# Altium PCB rpi_board.PcbDoc (part 2 of 2)
Units mm, origin at the board's own origin, x right, y up, seen from the top; angles counter-clockwise.
Board outline 68.45 x 53.59 mm, 2 copper layers (Top Layer, Bottom Layer), stack 1.569 mm thick; 73 components, 83 nets, 335 pads, 96 vias.
Unrouted connection lines stored in the file: 3.
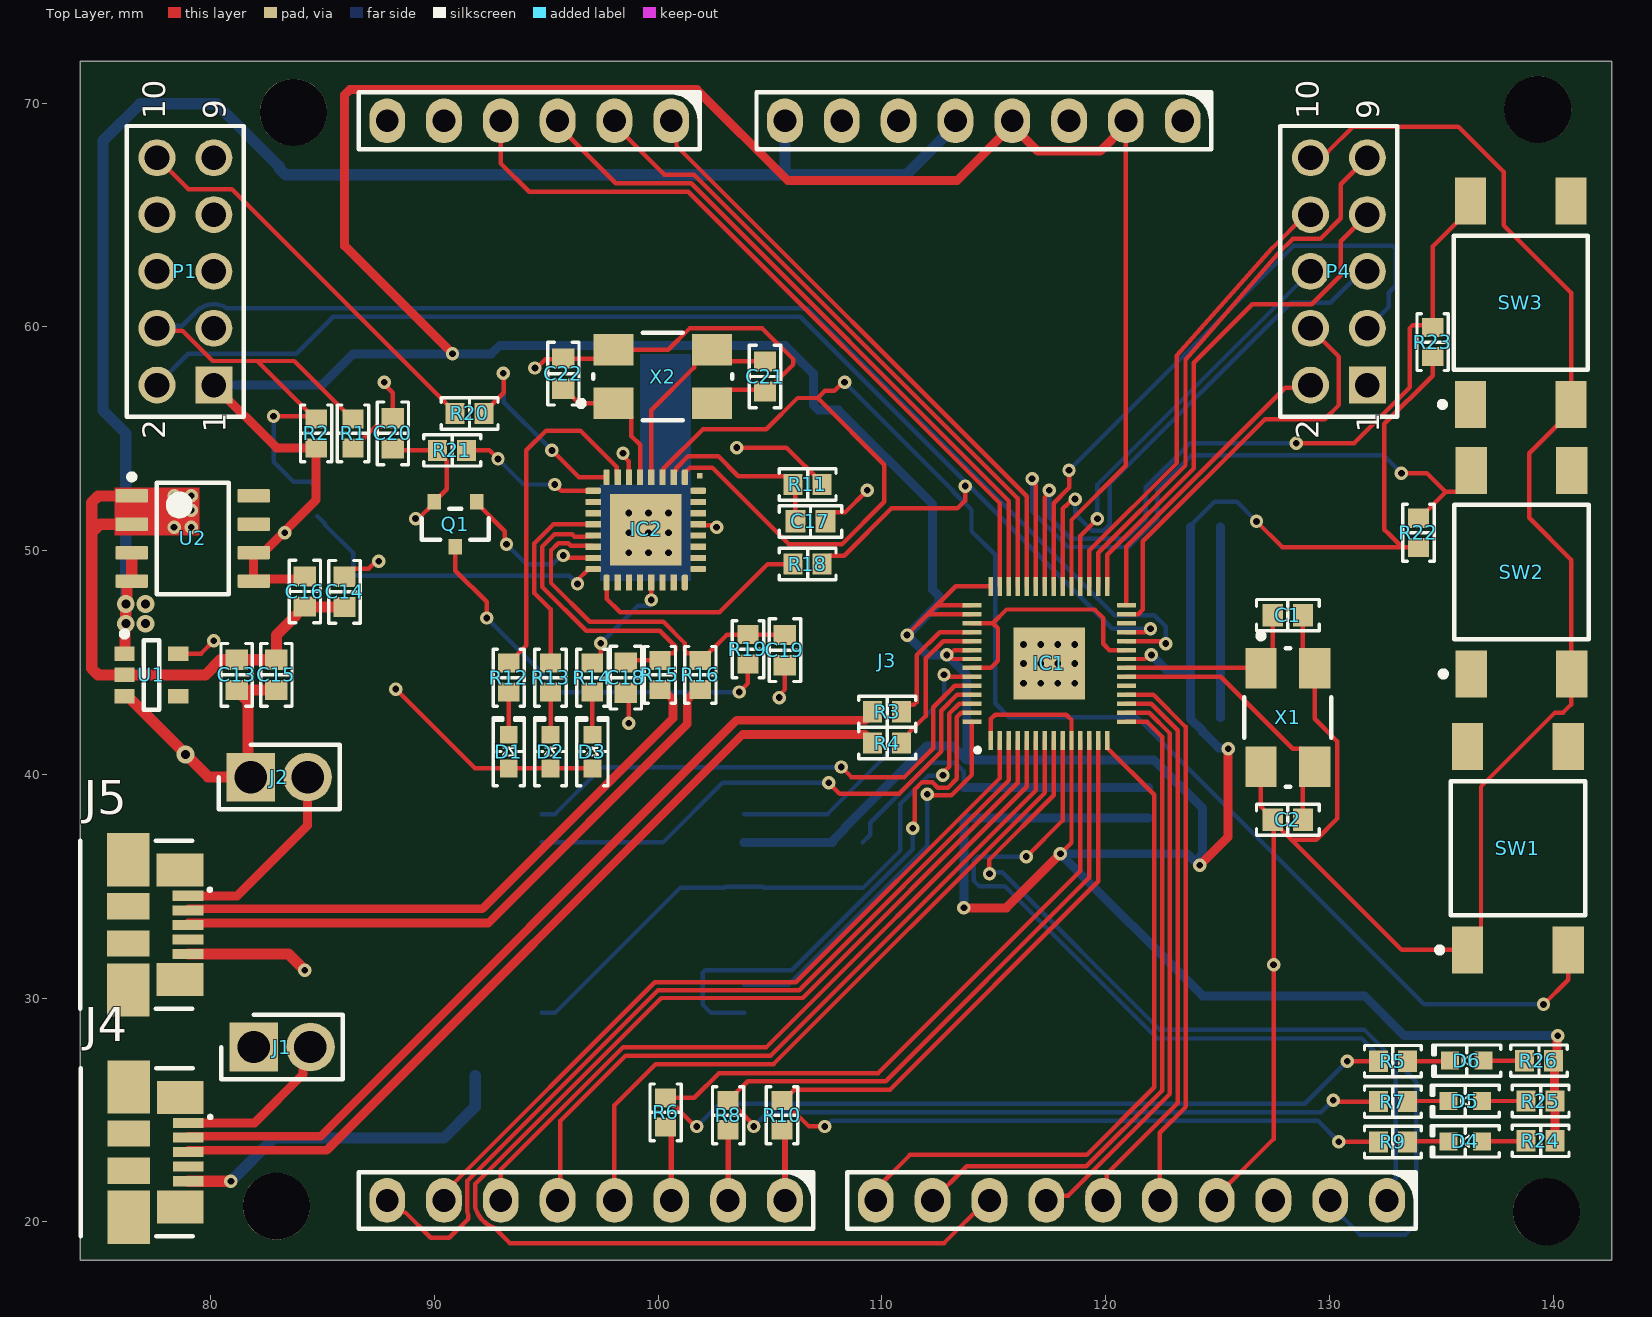
[diagram p0: Top Layer view]

## Via types
v1: diameter 0.6, hole 0.3, Top Layer to Bottom Layer, 91 vias
v2: diameter 0.8, hole 0.4, Top Layer to Bottom Layer, 5 vias

## Nets (pads, with @x,y where several pads share a name; then routed paths per layer and width w, separated by ;. In a path a pad name is that pad's centre, name@x,y a point inside that pad or via, vN(x,y) a via of type N, cw(c..) or ccw(c..) an arc to the next point about the centre after c; other vN are vias at no path point) (continued)
NetIC1_39: (continued)
  Top Layer w0.2: J3.10 98.044,69.037 100.279,66.802 101.6,66.802 116.065,52.337 116.065,50.54 116.075,50.53 IC1.39
NetIC1_40: IC1.40 J3.11 | length 31.1
  Top Layer w0.2: J3.11 95.504,69.015 98.098,66.421 101.473,66.421 115.675,52.219 IC1.40
NetIC1_41: IC1.41 J3.12 | length 34.2
  Top Layer w0.2: J3.12 92.964,67.31 94.234,66.04 101.346,66.04 115.275,52.111 IC1.41
NetIC1_51: IC1.51 U3.1 | length 13.4
  Top Layer w0.2: v1(112.776,44.45) 112.884,44.45 112.976,44.358 IC1.51
  Bottom Layer w0.2: U3.1 107.569,38.227 112.776,43.434 v1(112.776,44.45)
NetIC1_52: IC1.52 U3.16 | length 23.1
  Top Layer w0.2: v1(108.188,40.33) 108.638,39.88 111.01,39.88 112.3,41.17 112.3,42.996 113.262,43.958 IC1.52
  Bottom Layer w0.2: U3.16 95.389,38.227 97.492,40.33 v1(108.188,40.33)
NetIC1_53: IC1.53 U3.15 | length 23.4
  Top Layer w0.2: v1(107.623,39.625) 108.107,39.14 110.766,39.14 112.65,41.025 112.65,42.851 113.357,43.558 IC1.53
  Bottom Layer w0.2: U3.15 100.21,36.957 102.878,39.625 v1(107.623,39.625)
NetIC1_54: IC1.54 U3.9 | length 27.7
  Top Layer w0.2: v1(112.726,39.959) 112.726,40.068 113,40.342 113,42.707 113.451,43.158 IC1.54
  Bottom Layer w0.2: U3.9 95.389,29.337 100.977,34.925 102.969,34.925 103.011,34.967 104.667,34.967 104.709,34.925 109.155,34.925 110.829,36.599 110.829,38.693 112.082,39.946 112.713,39.946 v1(112.726,39.959)
NetIC1_55: IC1.55 U3.8 | length 23.6
  Top Layer w0.2: v1(111.379,37.592) 111.456,37.669 111.456,37.901 111.464,37.909 111.464,39.328 111.794,39.658 112.25,39.658 112.498,39.409 112.954,39.409 113.35,39.806 113.35,42.562 113.546,42.758 IC1.55
  Bottom Layer w0.2: U3.8 102.362,29.337 101.981,29.718 101.981,31.125 102.098,31.242 105.967,31.242 111.379,36.654 v1(111.379,37.592)
NetIC1_56: IC1.56 U3.7 | length 17.8
  Top Layer w0.2: v1(112.022,39.108) 112.071,39.059 113.099,39.059 114.025,39.986 IC1.56
  Bottom Layer w0.2: U3.7 105.827,30.607 112.022,36.802 v1(112.022,39.108)
NetIC2_1: IC2.1 IC2.3 SW1.3 | length 77.5
  Top Layer w0.2: IC2.3 100.231,53.317 100.231,53.661 102.001,55.431 104.834,55.431 106.228,56.825 107.132,56.825 ; IC2.1 101.191,53.487 101.421,53.717 102.419,53.717 105.844,50.292 108.214,50.292 110.109,52.187 110.109,53.848 107.132,56.825 ; v1(108.331,57.531) 108.265,57.531 107.874,57.14 107.447,57.14 107.132,56.825 ; v1(139.573,29.718) 140.68,30.825 SW1.3
  Bottom Layer w0.2: v1(108.331,57.531) 113.171,52.691 113.171,52.66 114.005,51.825 114.005,50.871 115.062,49.814 115.062,43.18 115.697,42.545 121.412,42.545 134.239,29.718 v1(139.573,29.718)
NetIC2_7: IC2.7 R12.1 | length 15.4
  Top Layer w0.2: R12.1 94.107,45.761 94.107,54.483 94.996,55.372 96.52,55.372 98.151,53.741 98.151,53.317 IC2.7
NetIC2_8: IC2.8 R20.1 | length 9.5
  Top Layer w0.2: R20.1 92.217,56.184 93.091,57.058 93.091,57.912 v1(93.07,57.933) ; v1(95.25,54.483) 96.456,53.277 IC2.8
  Bottom Layer w0.2: v1(93.07,57.933) 93.091,57.912 93.091,56.642 v1(95.25,54.483)
NetIC2_9: IC2.9 R21.2 | length 6.4
  Top Layer w0.2: R21.2 92.456,54.483 v1(92.837,54.102) ; v1(95.377,52.959) 95.659,52.677 IC2.9
  Bottom Layer w0.2: v1(92.837,54.102) 93.98,52.959 v1(95.377,52.959)
NetIC2_12: IC2.12 R13.1 | length 8.6
  Top Layer w0.2: R13.1 95.186,47.378 94.457,48.107 94.457,50.323 95.315,51.181 97.087,51.181 IC2.12
NetIC2_15: IC2.15 Q1.1 | length 6.9
  Top Layer w0.2: Q1.1 91.882,52.131 93.141,50.872 93.141,50.369 v1(93.218,50.292) ; v1(95.757,49.784) 95.865,49.784 95.973,49.677 IC2.15
  Bottom Layer w0.2: v1(93.218,50.292) 94.107,49.403 95.29,49.403 95.672,49.784 v1(95.757,49.784)
NetIC2_16: IC2.16 R17.1 | length 14.5
  Top Layer w0.2: v1(96.393,48.514) 96.393,48.689 96.881,49.177 IC2.16
  Bottom Layer w0.2: R17.1@84.759,51.547 85.084,51.222 85.084,51.172 86.375,49.881 86.375,48.997 86.492,48.88 96.027,48.88 v1(96.393,48.514)
NetIC2_17: IC2.17 R18.1 | length 10.2
  Top Layer w0.2: IC2.17 97.691,47.851 98.298,47.244 102.743,47.244 104.902,49.403 R18.1
NetIC2_21: IC2.21 R14.1 | length 5
  Top Layer w0.2: R14.1 97.104,44.973 97.429,45.298 v1(97.429,45.867) ; IC2.21 99.692,48.576 99.692,47.797 v1(99.693,47.796)
  Bottom Layer w0.2: v1(97.429,45.867) 99.11,47.548 99.618,47.548 99.618,47.722 v1(99.693,47.796)
NetJ1_2: J1.2 J4.1 | length 7.4
  Top Layer w0.4: J4.1 81.945,24.414 84.115,26.584 84.115,27.473 J1.2
NetJ2_2: J2.2 J5.1 | length 8.8
  Top Layer w0.4: J5.1 81.181,34.574 84.328,37.721 J2.2
NetJ3_13: J3.13
NetJ3_14: J3.14
NetJ3_20: J3.20 R6.2 | length 3.4
  Top Layer w0.254: R6.2 100.584,23.988 J3.20
NetJ3_21: J3.21 R8.2 | length 3.2
  Top Layer w0.254: J3.21 R8.2
NetJ3_22: J3.22 R10.2 | length 3.2
  Top Layer w0.254: R10.2 105.664,23.988 J3.22
NetP1_10: P1.10 R20.2 | length 18.1
  Top Layer w0.2: P1.10 78.994,66.167 80.934,66.167 90.917,56.184 R20.2
NetQ1_3: Q1.3 R19.1 | length 17.8
  Top Layer w0.2: Q1.3 90.932,49.109 92.329,47.712 v1(92.329,46.99) ; v1@103.632,43.688 104.013,44.069 R19.1
  Bottom Layer w0.2: v1(92.329,46.99) 95.637,43.682 v1(103.621,43.682)
USB_D_N: C18.2 IC2.13 R15.2 | length 14.1
  Top Layer w0.2: IC2.13 97.051,50.637 96.761,50.637 96.751,50.627 96.258,50.627 96.151,50.734 95.364,50.734 94.807,50.178 94.807,48.391 96.78,46.419 100.067,46.419 100.778,45.708 100.778,45.542 100.661,45.425 100.401,45.425 R15.2 98.654,45.1 C18.2
USB_D_P: C19.2 IC2.14 R16.2 R19.2 | length 16.1
  Top Layer w0.2: IC2.14 97.051,50.217 96.761,50.217 96.751,50.227 96.092,50.227 95.985,50.334 95.529,50.334 95.207,50.012 95.207,48.557 96.945,46.819 100.233,46.819 101.178,45.874 101.178,45.542 101.295,45.425 101.555,45.425 R16.2 101.93,45.1 103.073,46.243 R19.2 105.649,46.243 C19.2
USB_DE_N: J5.2 R15.1 | length 26.8
  Top Layer w0.381: J5.2@78.986,33.992 92.144,33.992 100.661,42.509 100.661,43.342 100.437,43.565 100.311,43.565 R15.1
USB_DE_P: J5.3 R16.1 | length 27.9
  Top Layer w0.381: J5.3@78.986,33.357 92.407,33.357 101.296,42.246 101.296,43.342 101.519,43.565 101.646,43.565 R16.1
USB_DM_N: IC1.46 R3.1 | length 5.8
  Top Layer w0.2: R3.1 111.205,43.118 111.433,43.118 111.55,43.235 111.55,45.33 112.579,46.358 IC1.46
USB_DM_P: IC1.47 R4.2 | length 6.6
  Top Layer w0.2: R4.2 111.211,41.727 111.211,41.87 111.95,42.609 111.95,45.164 112.744,45.958 IC1.47
USB_R_N: J4.2 R3.2 | length 38.5
  Top Layer w0.381: J4.2@78.994,23.832 84.921,23.832 103.507,42.418 109.255,42.418 109.586,42.749 R3.2
USB_R_P: J4.3 R4.1 | length 38.5
  Top Layer w0.381: J4.3@78.994,23.197 85.184,23.197 103.77,41.783 109.255,41.783 109.586,41.452 R4.1
VR_OUT: IC1.23 IC1.45 IC1.50 | length 11.6
  Top Layer w0.2: IC1.50 114.862,44.758 115.189,45.085 115.189,46.526 114.957,46.758 ; IC1.45 114.957,46.758 ; IC1.23 120.167,45.558 119.888,45.837 119.888,46.99 119.507,47.371 115.57,47.371 114.957,46.758
pads on no net: IC1.19 IC1.26 IC2.10 IC2.11 IC2.18 IC2.19 IC2.20 IC2.22 IC2.23 IC2.24 IC2.25 IC2.26 IC2.27 IC2.28 IC2.30 IC2.31 IC2.32 IC2.M1 J3.1 J3.3 J3.30 J4.4 J4.6 J4.7 J4.8 J4.9 J4.10 J4.11 J5.4 J5.6 J5.7 J5.8 J5.9 J5.10 J5.11 P1.8 SW1.2 SW1.4 SW2.1 SW2.4 SW3.1 SW3.4 U1.4 U2.7 U2.8 U3.3 U3.4 U3.5 U3.6 U3.11 U3.12 U3.13 U3.14

## Polygon pours and split planes (outlines as drawn)
GND on Bottom Layer "GND_L02_P005" (solid, remove dead copper, pour order 5): 134.366,26.684 134.366,71.882 74.676,71.882 74.549,72.009 74.168,71.628 74.168,26.684
3V3_DEBUG on Bottom Layer "3V3_DEBUG_L02_P000" (solid, pour order 0): 104.648,55.499 104.648,50.229 97.091,42.672 79.248,42.672 78.994,42.926 78.486,43.434 78.486,45.974 78.359,45.974 79.121,46.736 82.34,46.736 83.61,48.006 91.688,55.499
5V on Bottom Layer "5V_L02_P002" (solid, pour order 2): 78.232,43.18 79.121,42.291 82.804,42.291 82.804,26.797 80.645,26.797 80.447,26.995 80.447,38.735 77.724,38.735 75.438,41.021 75.438,50.292 77.343,50.292 78.232,49.403

## Other copper
Top Layer:
  rectangle net GND: 75.692,50.673 79.502,52.832
Bottom Layer:
  rectangle net GND: 99.187,52.705 101.473,58.801
  rectangle net GND: 97.409,48.641 101.473,52.959

## Text inside footprints (layer, text, board x,y; h text height)
P1: Top Overlay "10" at 77.967,69.294 h1.02 r90; Top Overlay "9" at 80.667,69.294 h1.02 r90; Top Overlay "1" at 80.667,55.274 h1.02 r90; Top Overlay "2" at 77.967,54.974 h1.02 r90
P4: Top Overlay "2" at 129.529,54.974 h1.02 r90; Top Overlay "1" at 132.229,55.274 h1.02 r90; Top Overlay "9" at 132.229,69.294 h1.02 r90; Top Overlay "10" at 129.529,69.294 h1.02 r90